# EAGLE board Three filters (EAGLE 9.6.2)
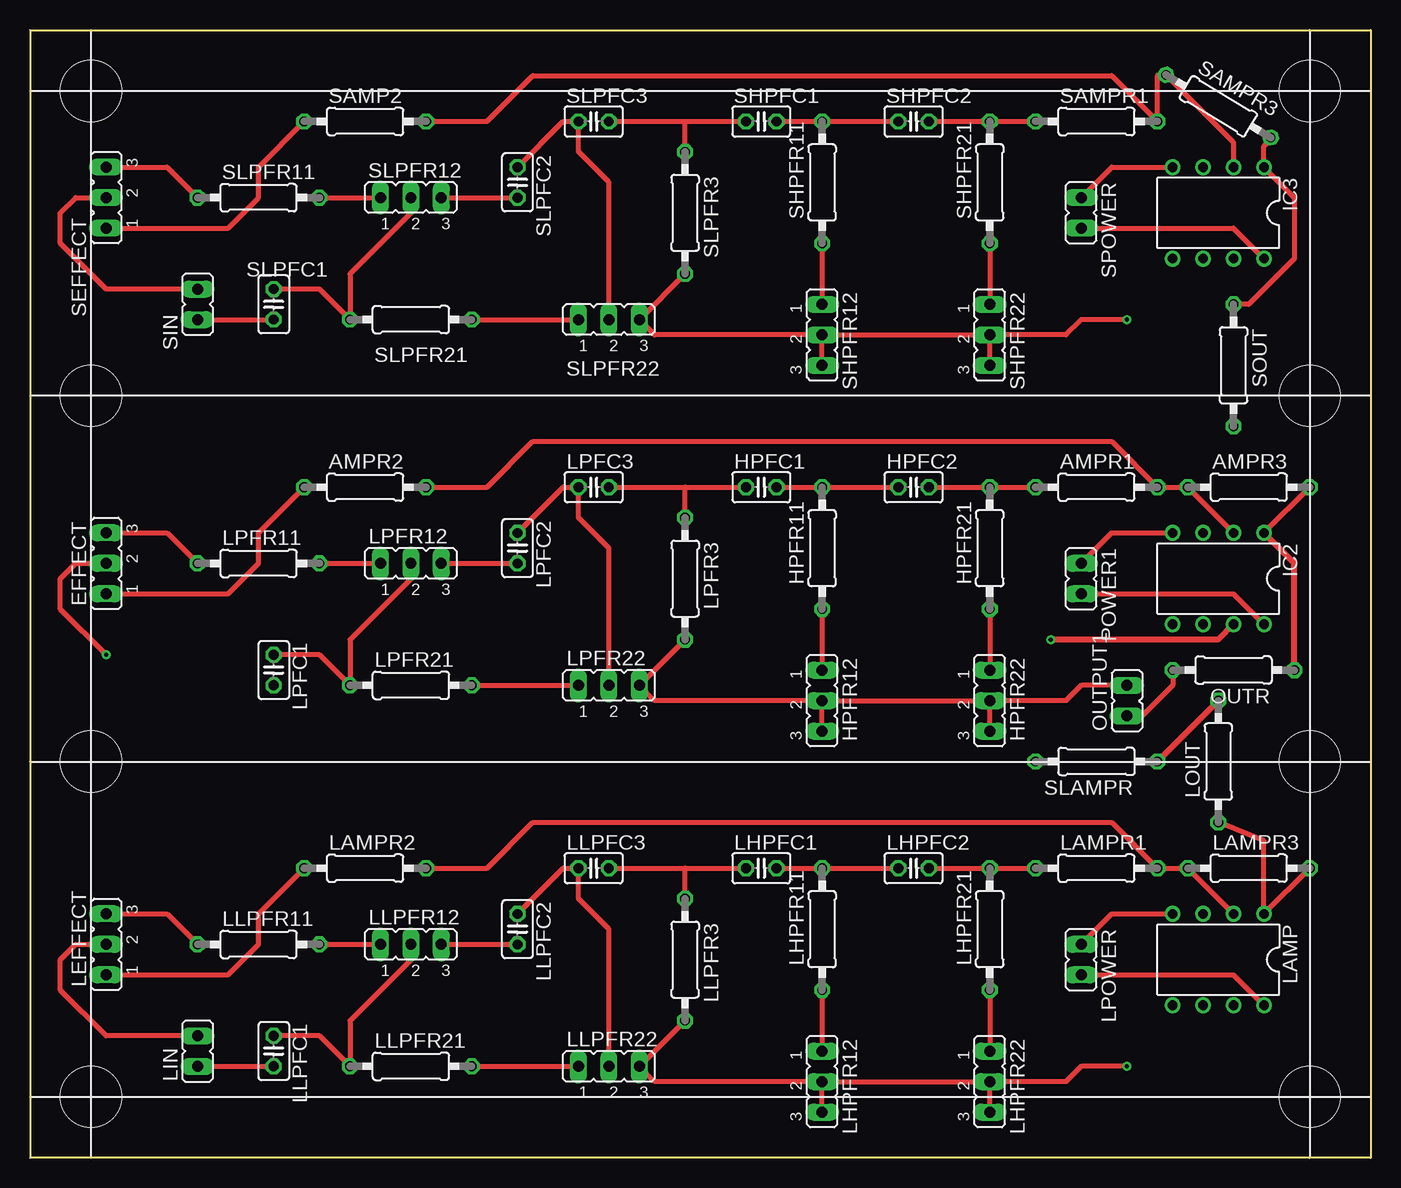
[diagram p0: board, top side]
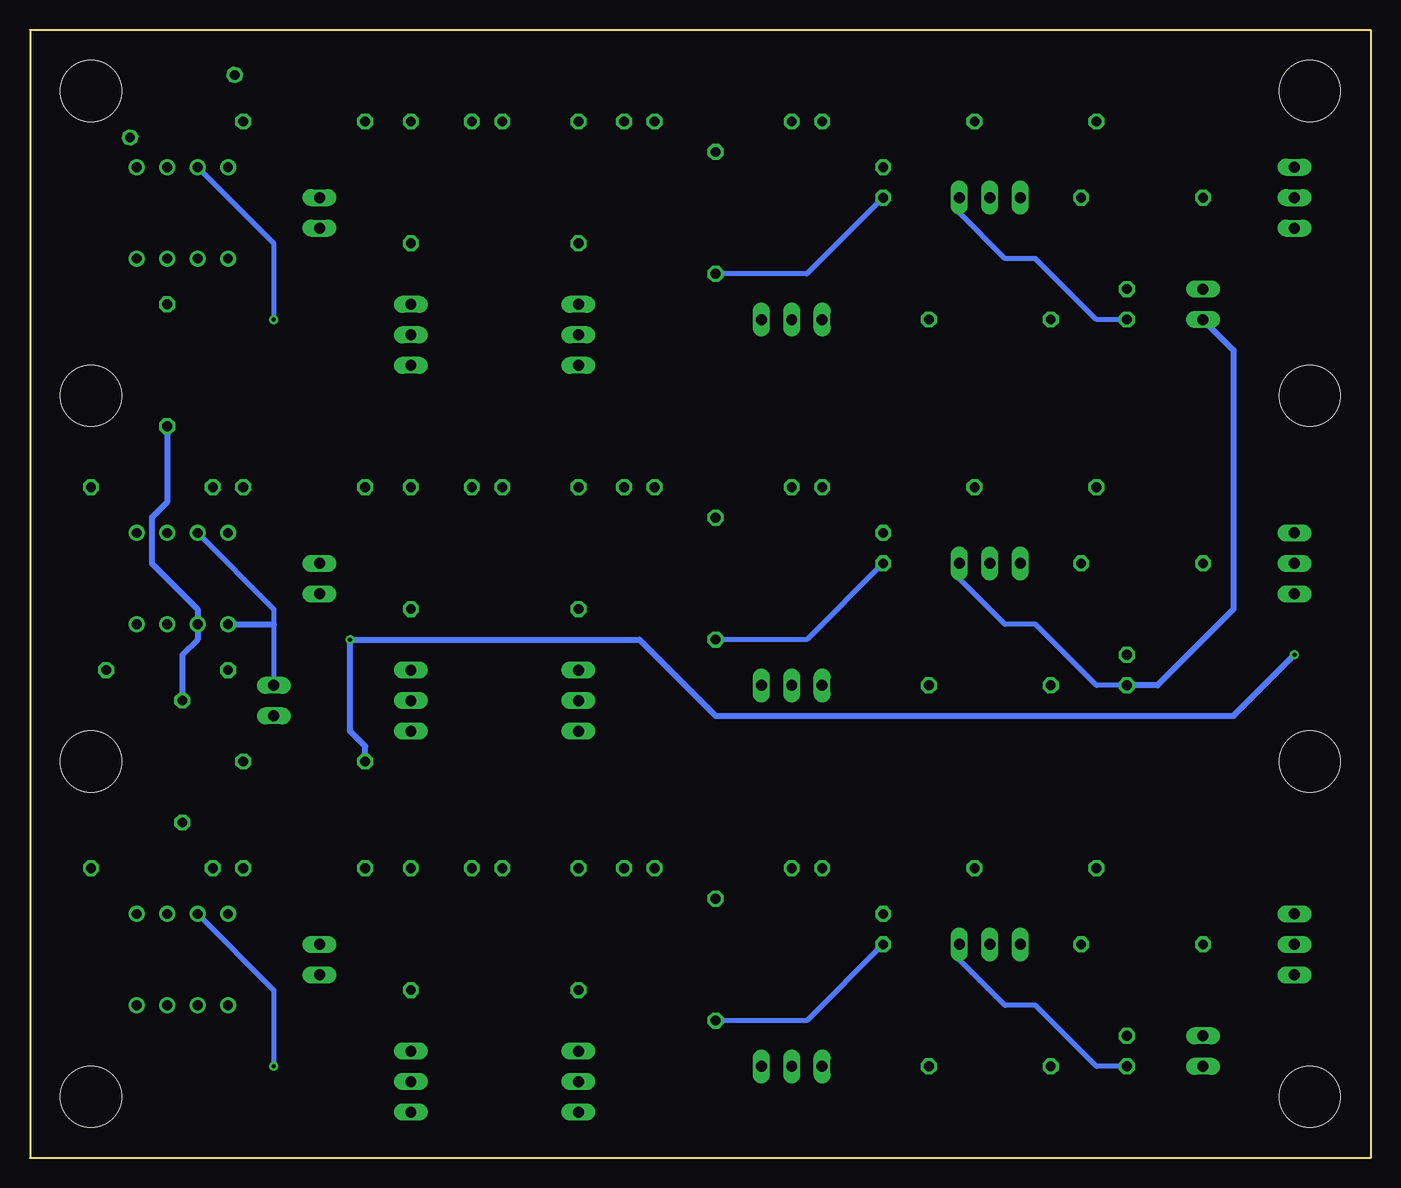
[diagram p1: board, bottom side, seen from below]

Size 111.76 x 93.98 mm. Coordinates in mm from the lower left corner, seen from the top.
Outline: 0,93.98 111.76,93.98 111.76,0 0,0 0,93.98
Copper layers (1*16): Top 0.035mm / dielectric 1.5mm / Bottom 0.035mm
Design rules "default": minimum track width 6mil, minimum drill 0.35mm, track to track 6mil, track to pad 6mil, pad to pad 6mil, via to via 6mil, smd to smd 6mil, copper to edge 40mil, drill to drill 6mil, minimum pad ring 10mil, minimum via ring 8mil, stop-mask expansion 4mil, vias tented up to drill 0mil, thermal gap 10mil
Holes 5.08 mm at 5.08,88.9 5.08,5.08 106.68,5.08 5.08,33.02 106.68,33.02 106.68,63.5 5.08,63.5 106.68,88.9

## Footprints (pad centres in the part's own frame; a part is rotated, then mirrored left to right if it is on the bottom)
0207/10 = drill 0.813 octagon: 1 -5.08,0; 2 5.08,0
JP2 = drill 0.914 long: 1 -2.54,0; 2 0,0; 3 2.54,0
C025-025X050 = drill 0.813 octagon: 1 -1.27,0; 2 1.27,0
DIL08 = drill 0.813 pad 1.27: 1 -3.81,-3.81; 2 -1.27,-3.81; 3 1.27,-3.81; 4 3.81,-3.81; 5 3.81,3.81; 6 1.27,3.81; 7 -1.27,3.81; 8 -3.81,3.81
JP1 = drill 0.914 long: 1 0,-1.27; 2 0,1.27

## Placement (x,y rotation side)
AMPR1  10k  [0207/10]  88.9,55.88 0 top
AMPR2  10k  [0207/10]  27.94,55.88 0 top
AMPR3  20k  [0207/10]  101.6,55.88 0 top
EFFECT  220k log  [JP2]  6.35,49.53 90 top
HPFC1  47n  [C025-025X050]  60.96,55.88 0 top
HPFC2  47n  [C025-025X050]  73.66,55.88 0 top
HPFR11  150  [0207/10]  66.04,50.8 90 top
HPFR12  220k log  [JP2]  66.04,38.1 270 top
HPFR21  150  [0207/10]  80.01,50.8 90 top
HPFR22  220k log  [JP2]  80.01,38.1 270 top
IC2  LM358N  [DIL08]  99.06,48.26 180 top
IC3  LM358N  [DIL08]  99.06,78.74 180 top
LAMP  LM358N  [DIL08]  99.06,16.51 180 top
LAMPR1  10k  [0207/10]  88.9,24.13 0 top
LAMPR2  10k  [0207/10]  27.94,24.13 0 top
LAMPR3  20k  [0207/10]  101.6,24.13 0 top
LEFFECT  220k log  [JP2]  6.35,17.78 90 top
LHPFC1  47n  [C025-025X050]  60.96,24.13 0 top
LHPFC2  47n  [C025-025X050]  73.66,24.13 0 top
LHPFR11  150  [0207/10]  66.04,19.05 90 top
LHPFR12  220k log  [JP2]  66.04,6.35 270 top
LHPFR21  150  [0207/10]  80.01,19.05 90 top
LHPFR22  220k log  [JP2]  80.01,6.35 270 top
LIN  [JP1]  13.97,8.89 0 top
LLPFC1  47n  [C025-025X050]  20.32,8.89 270 top
LLPFC2  47n  [C025-025X050]  40.64,19.05 270 top
LLPFC3  100n  [C025-025X050]  46.99,24.13 0 top
LLPFR3  100k  [0207/10]  54.61,16.51 270 top
LLPFR11  150  [0207/10]  19.05,17.78 0 top
LLPFR12  220k log  [JP2]  31.75,17.78 0 top
LLPFR21  150  [0207/10]  31.75,7.62 0 top
LLPFR22  220k log  [JP2]  48.26,7.62 0 top
LOUT  10k  [0207/10]  99.06,33.02 90 top
LPFC1  47n  [C025-025X050]  20.32,40.64 270 top
LPFC2  47n  [C025-025X050]  40.64,50.8 270 top
LPFC3  100n  [C025-025X050]  46.99,55.88 0 top
LPFR3  100k  [0207/10]  54.61,48.26 270 top
LPFR11  150  [0207/10]  19.05,49.53 0 top
LPFR12  220k log  [JP2]  31.75,49.53 0 top
LPFR21  150  [0207/10]  31.75,39.37 0 top
LPFR22  220k log  [JP2]  48.26,39.37 0 top
LPOWER  [JP1]  87.63,16.51 180 top
OUTPUT1  [JP1]  91.44,38.1 0 top
OUTR  100  [0207/10]  100.33,40.64 180 top
POWER1  [JP1]  87.63,48.26 180 top
SAMP2  10k  [0207/10]  27.94,86.36 0 top
SAMPR1  10k  [0207/10]  88.9,86.36 0 top
SAMPR3  20k  [0207/10]  99.06,87.63 329.1 top
SEFFECT  220k log  [JP2]  6.35,80.01 90 top
SHPFC1  47n  [C025-025X050]  60.96,86.36 0 top
SHPFC2  47n  [C025-025X050]  73.66,86.36 0 top
SHPFR11  150  [0207/10]  66.04,81.28 90 top
SHPFR12  220k log  [JP2]  66.04,68.58 270 top
SHPFR21  150  [0207/10]  80.01,81.28 90 top
SHPFR22  220k log  [JP2]  80.01,68.58 270 top
SIN  [JP1]  13.97,71.12 0 top
SLAMPR  10k  [0207/10]  88.9,33.02 180 top
SLPFC1  47n  [C025-025X050]  20.32,71.12 270 top
SLPFC2  47n  [C025-025X050]  40.64,81.28 270 top
SLPFC3  100n  [C025-025X050]  46.99,86.36 0 top
SLPFR3  100k  [0207/10]  54.61,78.74 270 top
SLPFR11  150  [0207/10]  19.05,80.01 0 top
SLPFR12  220k log  [JP2]  31.75,80.01 0 top
SLPFR21  150  [0207/10]  31.75,69.85 0 top
SLPFR22  220k log  [JP2]  48.26,69.85 0 top
SOUT  10k  [0207/10]  100.33,66.04 270 top
SPOWER  [JP1]  87.63,78.74 180 top

## Library data of the parts
AMPR1-AMPR3 HPFR11 HPFR21 LAMPR1-LAMPR3 LHPFR11 LHPFR21 LLPFR3 LLPFR11 LLPFR21 LOUT LPFR3 LPFR11 LPFR21 OUTR SAMP2 SAMPR1 SAMPR3 SHPFR11 SHPFR21 SLAMPR SLPFR3 SLPFR11 SLPFR21 SOUT = rcl; SPICEPREFIX: R
EFFECT HPFR12 HPFR22 LEFFECT LHPFR12 LHPFR22 LIN LLPFR12 LLPFR22 LPFR12 LPFR22 LPOWER OUTPUT1 POWER1 SEFFECT SHPFR12 SHPFR22 SIN SLPFR12 SLPFR22 SPOWER = jumper
HPFC1 HPFC2 LHPFC1 LHPFC2 LLPFC1-LLPFC3 LPFC1-LPFC3 SHPFC1 SHPFC2 SLPFC1-SLPFC3 = rcl; SPICEPREFIX: C
IC2 IC3 LAMP = linear

## Nets
N$1: LLPFR11.2 LLPFR12.1
N$2: LLPFC1.1 LLPFR12.2 LLPFR21.1
N$3: LLPFC2.1 LLPFC3.1 LLPFR22.2
N$4: LAMP.3 LHPFR12.2 LHPFR12.3 LHPFR22.2 LHPFR22.3 LIN.1 LLPFC1.2 LLPFC2.2 LLPFR3.2 LLPFR12.3 LLPFR22.3
N$5: LEFFECT.3 LLPFR11.1
N$6: LHPFC1.2 LHPFC2.1 LHPFR11.2
N$7: LPFR11.2 LPFR12.1
N$8: LAMP.1 LAMPR3.2 LOUT.1
N$9: LAMP.8 LPOWER.2
N$10: LAMP.4 LPOWER.1
N$12: LAMPR2.1 LEFFECT.1
N$13: LLPFR21.2 LLPFR22.1
N$14: LHPFR21.1 LHPFR22.1
N$15: LAMPR1.1 LHPFC2.2 LHPFR21.2
N$16: LHPFR11.1 LHPFR12.1
N$17: LPFC1.1 LPFR12.2 LPFR21.1
N$18: LPFC2.1 LPFC3.1 LPFR22.2
N$19: LHPFC1.1 LLPFC3.2 LLPFR3.1
N$21: LEFFECT.2 LIN.2
N$22: LAMP.2 LAMPR1.2 LAMPR2.2 LAMPR3.1
N$23: HPFC1.2 HPFC2.1 HPFR11.2
N$24: IC2.8 POWER1.2
N$25: IC2.4 POWER1.1
N$27: OUTPUT1.1 OUTR.2
N$28: LPFR21.2 LPFR22.1
N$29: AMPR1.1 HPFC2.2 HPFR21.2
N$30: HPFR21.1 HPFR22.1
N$31: HPFR11.1 HPFR12.1
N$32: HPFC1.1 LPFC3.2 LPFR3.1
N$33: EFFECT.2 IC2.7 SLAMPR.2
N$34: AMPR1.2 AMPR2.2 AMPR3.1 IC2.2
N$35: AMPR2.1 EFFECT.1
N$36: EFFECT.3 LPFR11.1
N$37: SLPFR11.2 SLPFR12.1
N$38: SLPFC1.1 SLPFR12.2 SLPFR21.1
N$39: SLPFC2.1 SLPFC3.1 SLPFR22.2
N$40: HPFR12.2 HPFR12.3 HPFR22.2 HPFR22.3 IC2.3 IC2.5 IC3.3 LPFC1.2 LPFC2.2 LPFR3.2 LPFR12.3 LPFR22.3 OUTPUT1.2 SHPFR12.2 SHPFR12.3 SHPFR22.2 SHPFR22.3 SIN.1 SLPFC1.2 SLPFC2.2 SLPFR3.2 SLPFR12.3 SLPFR22.3
N$41: SHPFC1.2 SHPFC2.1 SHPFR11.2
N$42: IC3.8 SPOWER.2
N$43: IC3.4 SPOWER.1
N$44: IC3.1 SAMPR3.2 SOUT.1
N$46: SLPFR21.2 SLPFR22.1
N$47: SAMPR1.1 SHPFC2.2 SHPFR21.2
N$48: SHPFR21.1 SHPFR22.1
N$49: SHPFR11.1 SHPFR12.1
N$50: SHPFC1.1 SLPFC3.2 SLPFR3.1
N$51: SEFFECT.2 SIN.2
N$52: IC3.2 SAMP2.2 SAMPR1.2 SAMPR3.1
N$53: SAMP2.1 SEFFECT.1
N$54: SEFFECT.3 SLPFR11.1
S$1: IC2.6 LOUT.2 SLAMPR.1 SOUT.2
S$2: AMPR3.2 IC2.1 OUTR.1

## Tracks (layer width: path | path; a pad name or v marks a point on that pad's centre or on a via)
N$1
  Top 0.406: LLPFR11.2 LLPFR12.1
N$2
  Top 0.406: LLPFC1.1 24.13,10.16 LLPFR21.1 26.67,11.43 31.75,16.51 LLPFR12.2
N$3
  Top 0.406: LLPFC2.1 44.45,24.13 LLPFC3.1 45.72,21.59 48.26,19.05 LLPFR22.2
N$4  (via drill 0.35)
  Top 0.406: LLPFR12.3 LLPFC2.2 | LHPFR22.2 86.36,6.35 87.63,7.62 v91.44,7.62 | LHPFR12.2 LHPFR22.2 | LHPFR12.3 LHPFR12.2 | LHPFR22.3 LHPFR22.2 | LHPFR12.2 52.07,6.35 LLPFR22.3 LLPFR3.2 | LIN.1 LLPFC1.2
  Bottom 0.406: LAMP.3 91.44,13.97 v91.44,7.62 | LLPFC2.2 46.99,11.43 LLPFR3.2 | LLPFC1.2 22.86,7.62 27.94,12.7 30.48,12.7 34.29,16.51 LLPFR12.3
N$5
  Top 0.406: LEFFECT.3 11.43,20.32 LLPFR11.1
N$6
  Top 0.406: LHPFC1.2 LHPFR11.2 LHPFC2.1
N$7
  Top 0.406: LPFR11.2 LPFR12.1
N$8
  Top 0.406: LOUT.1 102.87,26.42 LAMP.1 LAMPR3.2
N$9
  Top 0.406: LPOWER.2 100.33,15.24 LAMP.8
N$10
  Top 0.406: LPOWER.1 90.17,20.32 LAMP.4
N$12
  Top 0.406: LEFFECT.1 16.51,15.24 19.05,17.78 19.05,20.32 LAMPR2.1
N$13
  Top 0.406: LLPFR21.2 LLPFR22.1
N$14
  Top 0.406: LHPFR21.1 LHPFR22.1
N$15
  Top 0.406: LHPFC2.2 LHPFR21.2 LAMPR1.1
N$16
  Top 0.406: LHPFR11.1 LHPFR12.1
N$17
  Top 0.406: LPFC1.1 24.13,41.91 LPFR21.1 26.67,43.18 31.75,48.26 LPFR12.2
N$18
  Top 0.406: LPFC2.1 44.45,55.88 LPFC3.1 45.72,53.34 48.26,50.8 LPFR22.2
N$19
  Top 0.406: LLPFC3.2 54.61,24.13 | 54.61,24.13 LHPFC1.1 | LLPFR3.1 54.61,24.13
N$21
  Top 0.406: LIN.2 6.35,10.16 2.54,13.97 2.54,16.51 3.81,17.78 LEFFECT.2
N$22
  Top 0.406: LAMP.2 LAMPR3.1 LAMPR1.2 90.17,27.94 41.91,27.94 38.1,24.13 LAMPR2.2
N$23
  Top 0.406: HPFC1.2 HPFR11.2 HPFC2.1
N$24
  Top 0.406: POWER1.2 100.33,46.99 IC2.8
N$25
  Top 0.406: POWER1.1 90.17,52.07 IC2.4
N$27
  Top 0.406: OUTPUT1.1 92.71,36.83 95.25,39.37 OUTR.2
N$28
  Top 0.406: LPFR21.2 LPFR22.1
N$29
  Top 0.406: HPFC2.2 HPFR21.2 AMPR1.1
N$30
  Top 0.406: HPFR21.1 HPFR22.1
N$31
  Top 0.406: HPFR11.1 HPFR12.1
N$32
  Top 0.406: LPFC3.2 54.61,55.88 | 54.61,55.88 HPFC1.1 | LPFR3.1 54.61,55.88
N$33  (via drill 0.35)
  Top 0.406: v6.35,41.91 2.54,45.72 2.54,48.26 3.81,49.53 EFFECT.2
  Top 0.508: IC2.7 99.06,43.18 v85.09,43.18
  Bottom 0.508: v6.35,41.91 11.43,36.83 54.61,36.83 60.96,43.18 v85.09,43.18 85.09,35.56 83.82,34.29 SLAMPR.2
N$34
  Top 0.406: IC2.2 AMPR3.1 AMPR1.2 90.17,59.69 41.91,59.69 38.1,55.88 AMPR2.2
N$35
  Top 0.406: EFFECT.1 16.51,46.99 19.05,49.53 19.05,52.07 AMPR2.1
N$36
  Top 0.406: EFFECT.3 11.43,52.07 LPFR11.1
N$37
  Top 0.406: SLPFR11.2 SLPFR12.1
N$38
  Top 0.406: SLPFC1.1 24.13,72.39 SLPFR21.1 26.67,73.66 31.75,78.74 SLPFR12.2
N$39
  Top 0.406: SLPFC2.1 44.45,86.36 SLPFC3.1 45.72,83.82 48.26,81.28 SLPFR22.2
N$40  (via drill 0.35)
  Top 0.406: SLPFR12.3 SLPFC2.2 | SHPFR22.2 86.36,68.58 87.63,69.85 v91.44,69.85 | SHPFR12.2 SHPFR22.2 | SHPFR12.3 SHPFR12.2 | SHPFR22.3 SHPFR22.2 | SHPFR12.2 52.07,68.58 SLPFR22.3 SLPFR3.2 | SIN.1 SLPFC1.2 | LPFR12.3 LPFC2.2 | HPFR22.2 86.36,38.1 87.63,39.37 OUTPUT1.2 | HPFR12.2 HPFR22.2 | HPFR12.3 HPFR12.2 | HPFR22.3 HPFR22.2 | HPFR12.2 52.07,38.1 LPFR22.3 LPFR3.2
  Bottom 0.406: IC3.3 91.44,76.2 v91.44,69.85 | SLPFC2.2 46.99,73.66 SLPFR3.2 | SLPFC1.2 22.86,69.85 27.94,74.93 30.48,74.93 34.29,78.74 SLPFR12.3 | IC2.3 91.44,45.72 91.44,44.45 OUTPUT1.2 | LPFC2.2 46.99,43.18 LPFR3.2 | LPFC1.2 22.86,39.37 27.94,44.45 30.48,44.45 34.29,48.26 LPFR12.3
  Bottom 0.508: SIN.1 11.43,67.31 11.43,45.72 17.78,39.37 LPFC1.2 | IC2.5 91.44,44.45
N$41
  Top 0.406: SHPFC1.2 SHPFR11.2 SHPFC2.1
N$42
  Top 0.406: SPOWER.2 100.33,77.47 IC3.8
N$43
  Top 0.406: SPOWER.1 90.17,82.55 IC3.4
N$44
  Top 0.406: SOUT.1 101.6,71.12 105.41,74.93 105.41,80.01 IC3.1 102.87,84.31 103.26,84.7 103.22,84.82 SAMPR3.2
N$46
  Top 0.406: SLPFR21.2 SLPFR22.1
N$47
  Top 0.406: SHPFC2.2 SHPFR21.2 SAMPR1.1
N$48
  Top 0.406: SHPFR21.1 SHPFR22.1
N$49
  Top 0.406: SHPFR11.1 SHPFR12.1
N$50
  Top 0.406: SLPFC3.2 54.61,86.36 | 54.61,86.36 SHPFC1.1 | SLPFR3.1 54.61,86.36
N$51
  Top 0.406: SIN.2 6.35,72.39 2.54,76.2 2.54,78.74 3.81,80.01 SEFFECT.2
N$52
  Top 0.406: IC3.2 100.33,84.61 SAMPR3.1 94.05,90.24 93.98,90.17 SAMPR1.2 90.17,90.17 41.91,90.17 38.1,86.36 SAMP2.2
N$53
  Top 0.406: SEFFECT.1 16.51,77.47 19.05,80.01 19.05,82.55 SAMP2.1
N$54
  Top 0.406: SEFFECT.3 11.43,82.55 SLPFR11.1
S$1
  Top 0.508: SLAMPR.1 LOUT.2
  Bottom 0.508: SOUT.2 100.33,54.61 101.6,53.34 101.6,49.53 97.79,45.72 IC2.6 97.79,43.18 99.06,41.91 LOUT.2
S$2
  Top 0.406: AMPR3.2 IC2.1
  Top 0.508: OUTR.1 105.41,49.53 IC2.1